# Altium PCB test.PcbDoc
Units mil, origin at the board's own origin, x right, y up, seen from the top; angles counter-clockwise.
Board outline 6250 x 4000 mil, 2 copper layers (Top Layer, Bottom Layer); 89 components, 84 nets, 511 pads, 0 vias.
Unrouted connection lines stored in the file: 226.
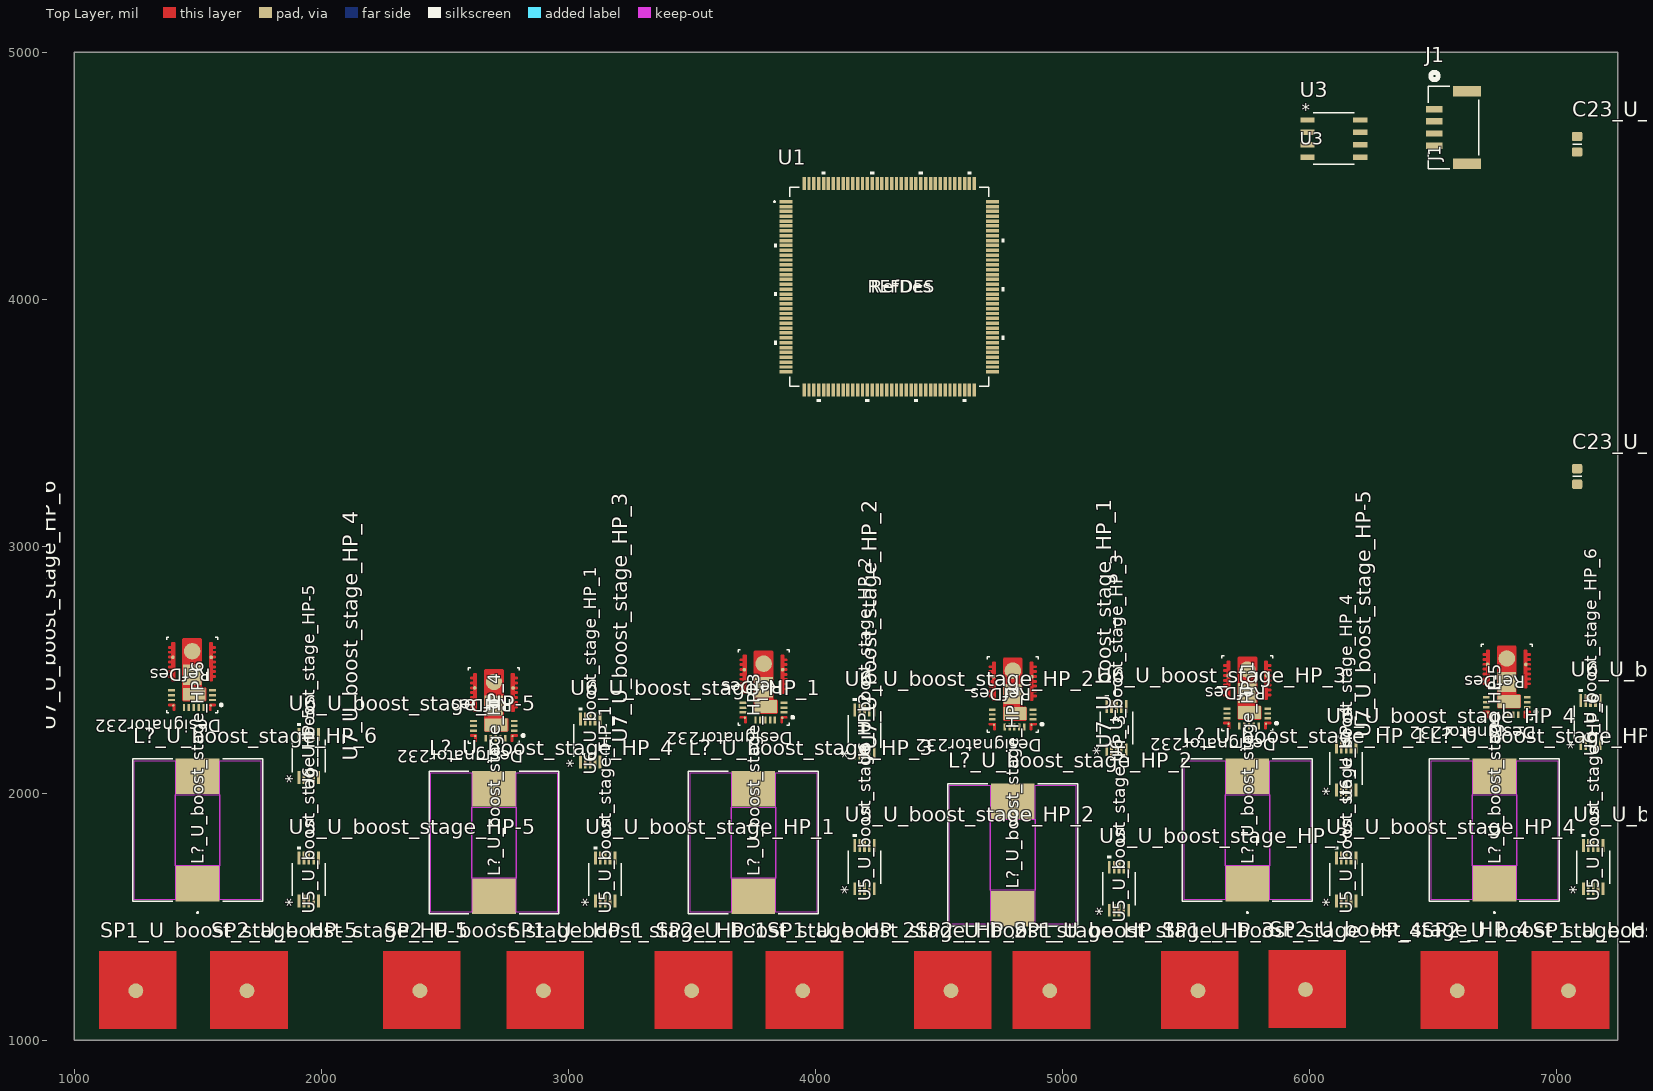
[diagram p0: Top Layer view]
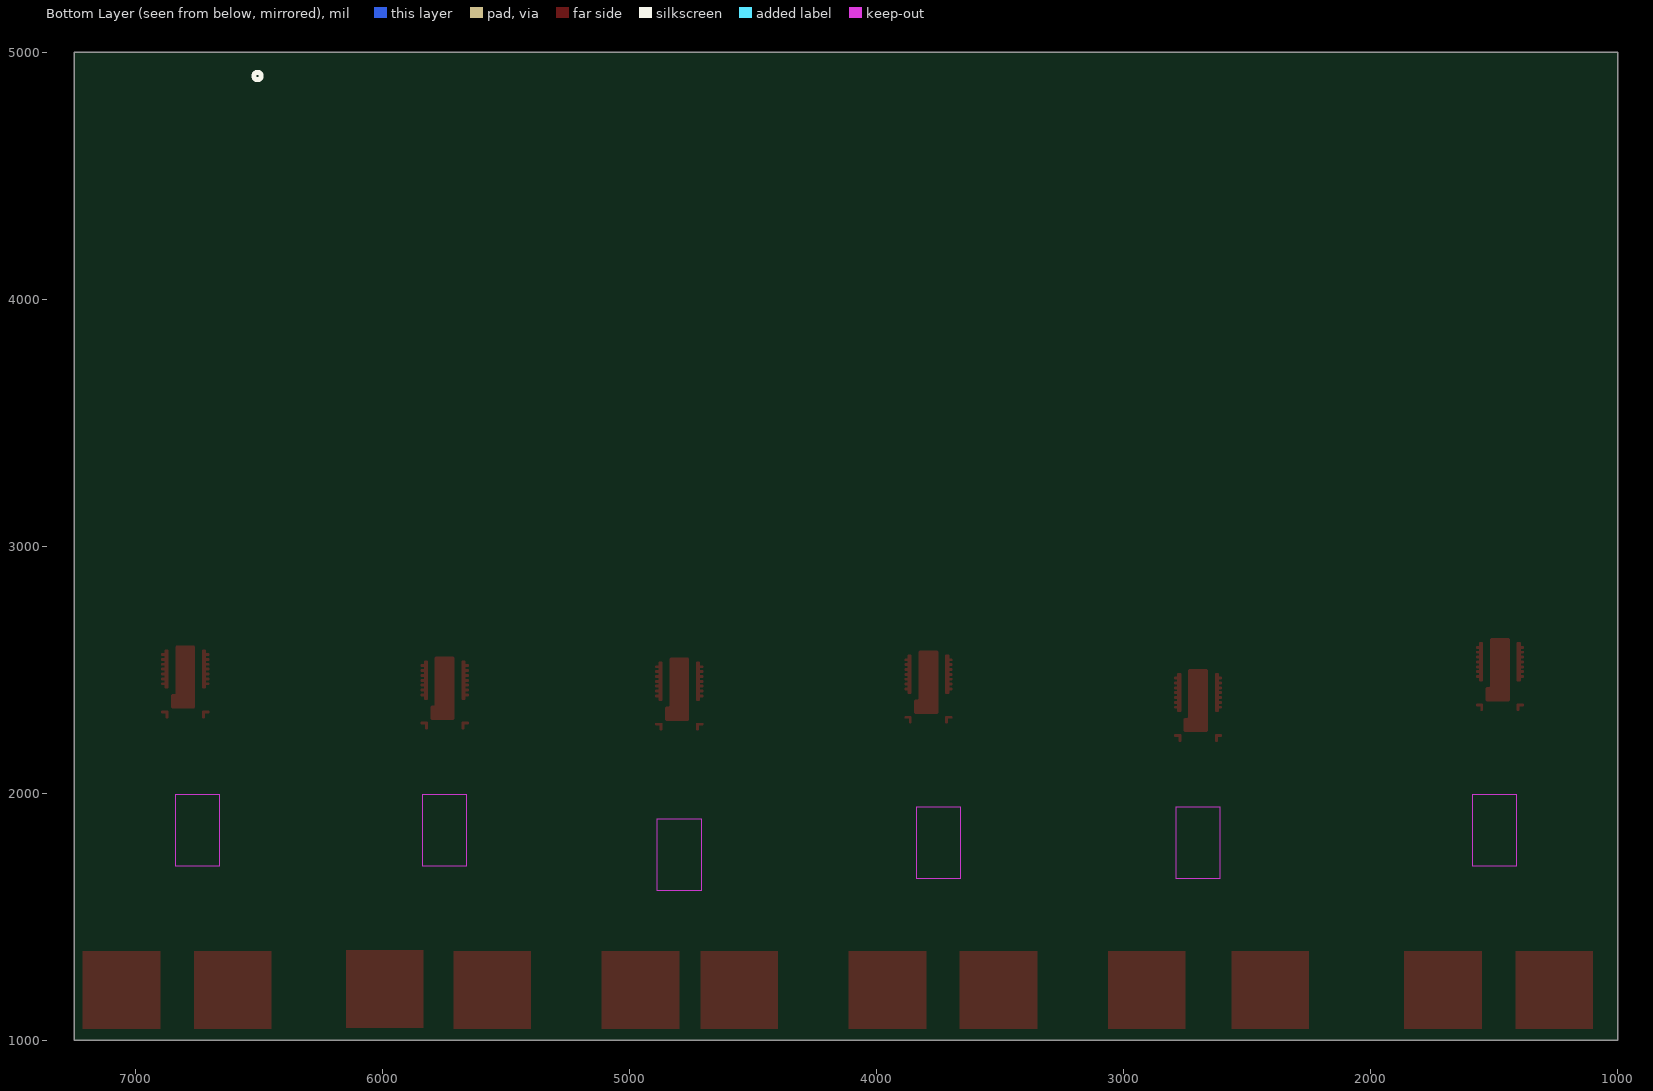
[diagram p1: Bottom Layer view, seen from below]

## Layer stack, top to bottom
Top Solder: solder mask 0.4, Solder Resist, Dk 3.5
Top Layer: signal copper 1.4
Dielectric 1: dielectric 12.6, FR-4, Dk 4.8
Bottom Layer: signal copper 1.4
Bottom Solder: solder mask 0.4, Solder Resist, Dk 3.5

## Board outline
1000,1000 7250,1000 7250,5000 1000,5000

## Design rules (kind name [scope] priority, off if disabled: settings)
Clearance [All] p1: gap=10 ignorepadtopadclearanceinfootprint=FALSE
DiffPairsRouting [All] p1: maxlimit=10 minlimit=10 mostfreqgap=10 toplayer_minwidth=15 toplayer_maxwidth=15 toplayer_prefwidth=15 bottomlayer_minwidth=15 bottomlayer_maxwidth=15 bottomlayer_prefwidth=15 maxuncoupledlength=500
PolygonConnect [All] p1: connectstyle=Relief reliefconductorwidth=10 reliefentries=4 polygonreliefangle="90 Angle" airgapwidth=10
RoutingVias [All] p1: holewidth=28 width=50 viastyle="Through Hole" minholewidth=28 minwidth=50 maxholewidth=28 maxwidth=50
SolderMaskExpansion [All] p1: expansion=4 istentingtop=FALSE
SupplyNets "Schematic Supply Nets_5" [InNet('CAN_5V')] p1: voltage=0.000
SupplyNets "Schematic Supply Nets_4" [InNet('3V3')] p2: voltage=0.000
SupplyNets "Schematic Supply Nets_3" [InNet('GND')] p3: voltage=0.000
SupplyNets "Schematic Supply Nets_2" [InNet('CAN_GND')] p4: voltage=0.000
SupplyNets "Schematic Supply Nets_1" [InNet('PGND')] p5: voltage=0.000
SupplyNets "Schematic Supply Nets" [InNet('VREF_P')] p6: voltage=0.000
Width [All] p1: maxlimit=10 minlimit=10 preferedwidth=10
29 further rules are at their usual default settings.

## Classes and differential pairs
channel class boost_stage_HP: U_boost_stage_HP-5 U_boost_stage_HP_1 U_boost_stage_HP_2 U_boost_stage_HP_3 U_boost_stage_HP_4 U_boost_stage_HP_6
component class U_microcontroller: C1 C2 C3 C4 C5 C6 C7 C8 C9 C10 C11 C12 C13 C14 C15 C16 C17 C18 C19 C20 C21 C22 J1 R1 R2 R3 U3 U4
component class U_boost_stage_HP_6: C23_U_boost_stage_HP_6 C24_U_boost_stage_HP_6 L?_U_boost_stage_HP_6 R4_U_boost_stage_HP_6 R5_U_boost_stage_HP_6 SP1_U_boost_stage_HP_6 SP2_U_boost_stage_HP_6 U5_U_boost_stage_HP_6 U6_U_boost_stage_HP_6 U7_U_boost_stage_HP_6
component class U_boost_stage_HP_4: C23_U_boost_stage_HP_4 C24_U_boost_stage_HP_4 L?_U_boost_stage_HP_4 R4_U_boost_stage_HP_4 R5_U_boost_stage_HP_4 SP1_U_boost_stage_HP_4 SP2_U_boost_stage_HP_4 U5_U_boost_stage_HP_4 U6_U_boost_stage_HP_4 U7_U_boost_stage_HP_4
component class U_boost_stage_HP_3: C23_U_boost_stage_HP_3 C24_U_boost_stage_HP_3 L?_U_boost_stage_HP_3 R4_U_boost_stage_HP_3 R5_U_boost_stage_HP_3 SP1_U_boost_stage_HP_3 SP2_U_boost_stage_HP_3 U5_U_boost_stage_HP_3 U6_U_boost_stage_HP_3 U7_U_boost_stage_HP_3
component class U_boost_stage_HP_2: C23_U_boost_stage_HP_2 C24_U_boost_stage_HP_2 L?_U_boost_stage_HP_2 R4_U_boost_stage_HP_2 R5_U_boost_stage_HP_2 SP1_U_boost_stage_HP_2 SP2_U_boost_stage_HP_2 U5_U_boost_stage_HP_2 U6_U_boost_stage_HP_2 U7_U_boost_stage_HP_2
component class U_boost_stage_HP_1: C23_U_boost_stage_HP_1 C24_U_boost_stage_HP_1 L?_U_boost_stage_HP_1 R4_U_boost_stage_HP_1 R5_U_boost_stage_HP_1 SP1_U_boost_stage_HP_1 SP2_U_boost_stage_HP_1 U5_U_boost_stage_HP_1 U6_U_boost_stage_HP_1 U7_U_boost_stage_HP_1
component class U_boost_stage_HP-5: C23_U_boost_stage_HP-5 C24_U_boost_stage_HP-5 L?_U_boost_stage_HP-5 R4_U_boost_stage_HP-5 R5_U_boost_stage_HP-5 SP1_U_boost_stage_HP-5 SP2_U_boost_stage_HP-5 U5_U_boost_stage_HP-5 U6_U_boost_stage_HP-5 U7_U_boost_stage_HP-5
differential pair CAN: +CAN_H -CAN_L

## Components (designator, comment, footprint, x,y, rotation, side; value= is the part's Value field where it differs from the comment)
C1 "CC0603KRX7R5BB225" C0603 9795,1965 r0 top value=2.2µF
C2 "CC0603KRX7R5BB225" C0603 9965,1965 r0 top value=2.2µF
C3 "CC0603MRX7R5BB475" C0603 7930,2415 r0 top value=4.7µF
C4 "CC0603KRX7R7BB105" C0603 8100,2415 r0 top value=1µF
C5 "CC0603KRX7R7BB105" C0603 8270,2415 r0 top value=1µF
C6 "CC0603KRX7R8BB104" C0603 8445,2415 r0 top value=100nF
C7 "CC0603KRX7R8BB104" C0603 8615,2415 r0 top value=100nF
C8 "CC0603KRX7R8BB104" C0603 7935,1965 r0 top value=100nF
C9 "CC0603KRX7R8BB104" C0603 8105,1965 r0 top value=100nF
C10 "CC0603KRX7R8BB104" C0603 8275,1905 r90 top value=100nF
C11 "CC0603KRX7R8BB104" C0603 8495,1965 r0 top value=100nF
C12 "CC0603KRX7R8BB104" C0603 8695,1905 r90 top value=100nF
C13 "CC0603KRX7R8BB104" C0603 8915,1905 r90 top value=100nF
C14 "CC0603KRX7R8BB104" C0603 9135,1905 r90 top value=100nF
C15 "CC0603KRX7R8BB104" C0603 9355,1905 r90 top value=100nF
C16 "CC0603KRX7R8BB104" C0603 9575,1905 r90 top value=100nF
C17 "CC0603KRX7R7BB105" C0603 11005,1905 r90 top value=1µF
C18 "CC0603KRX7R8BB104" C0603 11225,1905 r90 top value=100nF
C19 "CC0603KRX7R8BB104" C0603 11625,1905 r90 top value=100nF
C20 "CC0603KRX7R8BB104" C0603 10775,1905 r90 top value=100nF
C21 "CC0603KRX7R7BB105" C0603 10335,1965 r0 top value=1µF
C22 "CC0603KRX7R8BB104" C0603 10545,1905 r90 top value=100nF
C23_U_boost_stage_HP-5 "CC0603KRX7R8BB104" C0603 7085,3250 r90 top value=100nF (schematic designator C23)
C23_U_boost_stage_HP_1 "CC0603KRX7R8BB104" C0603 7085,4595 r90 top value=100nF (schematic designator C23)
C23_U_boost_stage_HP_2 "CC0603KRX7R8BB104" C0603 7085,5960 r90 top value=100nF (schematic designator C23)
C23_U_boost_stage_HP_3 "CC0603KRX7R8BB104" C0603 7085,7325 r90 top value=100nF (schematic designator C23)
C23_U_boost_stage_HP_4 "CC0603KRX7R8BB104" C0603 7085,8690 r90 top value=100nF (schematic designator C23)
C23_U_boost_stage_HP_6 "CC0603KRX7R8BB104" C0603 7085,10055 r90 top value=100nF (schematic designator C23)
C24_U_boost_stage_HP-5 "CC0603KRX7R8BB104" C0603 8435,3250 r90 top value=100nF (schematic designator C24)
C24_U_boost_stage_HP_1 "CC0603KRX7R8BB104" C0603 8415,4595 r90 top value=100nF (schematic designator C24)
C24_U_boost_stage_HP_2 "CC0603KRX7R8BB104" C0603 8435,5960 r90 top value=100nF (schematic designator C24)
C24_U_boost_stage_HP_3 "CC0603KRX7R8BB104" C0603 8435,7325 r90 top value=100nF (schematic designator C24)
C24_U_boost_stage_HP_4 "CC0603KRX7R8BB104" C0603 8435,8690 r90 top value=100nF (schematic designator C24)
C24_U_boost_stage_HP_6 "CC0603KRX7R8BB104" C0603 8435,10055 r90 top value=100nF (schematic designator C24)
J1 "BM04B-GHS-TBT" CONN_BM04B-GHS-TBT_JST 6585,4695 r90 top
L?_U_boost_stage_HP-5 "SLO1365H330MTT" IND_SLO1365H_SLT 6750,1850 r90 top (schematic designator L?)
L?_U_boost_stage_HP_1 "SLO1365H330MTT" IND_SLO1365H_SLT 5750,1850 r90 top (schematic designator L?)
L?_U_boost_stage_HP_2 "SLO1365H330MTT" IND_SLO1365H_SLT 4800,1750 r90 top (schematic designator L?)
L?_U_boost_stage_HP_3 "SLO1365H330MTT" IND_SLO1365H_SLT 3750,1800 r90 top (schematic designator L?)
L?_U_boost_stage_HP_4 "SLO1365H330MTT" IND_SLO1365H_SLT 2700,1800 r90 top (schematic designator L?)
L?_U_boost_stage_HP_6 "SLO1365H330MTT" IND_SLO1365H_SLT 1500,1850 r90 top (schematic designator L?)
R1 "RC0603JR-070RL" RESC1608X55X25ML10T15 13050,1955 r0 top value=0Ω
R2 "RC0603FR-0760R4L" RESC1608X55X25ML10T15 12870,1955 r0 top value=60.4Ω
R3 "RC0603FR-0760R4L" RESC1608X55X25ML10T15 11480,1955 r0 top value=60.4Ω
R4_U_boost_stage_HP-5 "PA2512FKE7T0R015E" FP-PA2512E-R007-0R10-MFG 15170,3065 r90 top value=15mΩ (schematic designator R4)
R4_U_boost_stage_HP_1 "PA2512FKE7T0R015E" FP-PA2512E-R007-0R10-MFG 15050,4410 r90 top value=15mΩ (schematic designator R4)
R4_U_boost_stage_HP_2 "PA2512FKE7T0R015E" FP-PA2512E-R007-0R10-MFG 15170,5770 r90 top value=15mΩ (schematic designator R4)
R4_U_boost_stage_HP_3 "PA2512FKE7T0R015E" FP-PA2512E-R007-0R10-MFG 15170,7135 r90 top value=15mΩ (schematic designator R4)
R4_U_boost_stage_HP_4 "PA2512FKE7T0R015E" FP-PA2512E-R007-0R10-MFG 15170,8500 r90 top value=15mΩ (schematic designator R4)
R4_U_boost_stage_HP_6 "PA2512FKE7T0R015E" FP-PA2512E-R007-0R10-MFG 15170,9865 r90 top value=15mΩ (schematic designator R4)
R5_U_boost_stage_HP-5 "PA2512FKF7W0R02E" FP-PA2512E-R007-0R10-MFG 16460,3065 r90 top value=20mΩ (schematic designator R5)
R5_U_boost_stage_HP_1 "PA2512FKF7W0R02E" FP-PA2512E-R007-0R10-MFG 16320,4410 r90 top value=20mΩ (schematic designator R5)
R5_U_boost_stage_HP_2 "PA2512FKF7W0R02E" FP-PA2512E-R007-0R10-MFG 16460,5770 r90 top value=20mΩ (schematic designator R5)
R5_U_boost_stage_HP_3 "PA2512FKF7W0R02E" FP-PA2512E-R007-0R10-MFG 16460,7135 r90 top value=20mΩ (schematic designator R5)
R5_U_boost_stage_HP_4 "PA2512FKF7W0R02E" FP-PA2512E-R007-0R10-MFG 16460,8500 r90 top value=20mΩ (schematic designator R5)
R5_U_boost_stage_HP_6 "PA2512FKF7W0R02E" FP-PA2512E-R007-0R10-MFG 16460,9865 r90 top value=20mΩ (schematic designator R5)
SP1_U_boost_stage_HP-5 "Solder Pad" "Solder Pad-Footprint-1" 1415,1045 r90 top (schematic designator SP1)
SP1_U_boost_stage_HP_1 "Solder Pad" "Solder Pad-Footprint-1" 3065,1045 r90 top (schematic designator SP1)
SP1_U_boost_stage_HP_2 "Solder Pad" "Solder Pad-Footprint-1" 4115,1045 r90 top (schematic designator SP1)
SP1_U_boost_stage_HP_3 "Solder Pad" "Solder Pad-Footprint-1" 5115,1045 r90 top (schematic designator SP1)
SP1_U_boost_stage_HP_4 "Solder Pad" "Solder Pad-Footprint-1" 5715,1045 r90 top (schematic designator SP1)
SP1_U_boost_stage_HP_6 "Solder Pad" "Solder Pad-Footprint-1" 7215,1045 r90 top (schematic designator SP1)
SP2_U_boost_stage_HP-5 "Solder Pad" "Solder Pad-Footprint-1" 1865,1045 r90 top (schematic designator SP2)
SP2_U_boost_stage_HP_1 "Solder Pad" "Solder Pad-Footprint-1" 2565,1045 r90 top (schematic designator SP2)
SP2_U_boost_stage_HP_2 "Solder Pad" "Solder Pad-Footprint-1" 3665,1045 r90 top (schematic designator SP2)
SP2_U_boost_stage_HP_3 "Solder Pad" "Solder Pad-Footprint-1" 4715,1045 r90 top (schematic designator SP2)
SP2_U_boost_stage_HP_4 "Solder Pad" "Solder Pad-Footprint-1" 6150,1050 r90 top (schematic designator SP2)
SP2_U_boost_stage_HP_6 "Solder Pad" "Solder Pad-Footprint-1" 6765,1045 r90 top (schematic designator SP2)
U1 "STM32H743ZIT6" LQFP144-20x20mm 4300,4050 r0 top
U3 "ISO1044BDR" SOIC_1044BDR_TEX 6100,4650 r0 top
U4 "ESDCAN05-2BWY" SOT323-3L_STM 10180,1755 r90 top
U5_U_boost_stage_HP-5 "INA238AIDGSR" VSSOP_8AIDGST_TEX 1950,1650 r90 top (schematic designator U5)
U5_U_boost_stage_HP_1 "INA238AIDGSR" VSSOP_8AIDGST_TEX 3150,1650 r90 top (schematic designator U5)
U5_U_boost_stage_HP_2 "INA238AIDGSR" VSSOP_8AIDGST_TEX 4200,1700 r90 top (schematic designator U5)
U5_U_boost_stage_HP_3 "INA238AIDGSR" VSSOP_8AIDGST_TEX 5230.31,1612.86 r90 top (schematic designator U5)
U5_U_boost_stage_HP_4 "INA238AIDGSR" VSSOP_8AIDGST_TEX 6150,1650 r90 top (schematic designator U5)
U5_U_boost_stage_HP_6 "INA238AIDGSR" VSSOP_8AIDGST_TEX 7150,1700 r90 top (schematic designator U5)
U6_U_boost_stage_HP-5 "INA238AIDGSR" VSSOP_8AIDGST_TEX 1950,2150 r90 top (schematic designator U6)
U6_U_boost_stage_HP_1 "INA238AIDGSR" VSSOP_8AIDGST_TEX 3089.38,2212.86 r90 top (schematic designator U6)
U6_U_boost_stage_HP_2 "INA238AIDGSR" VSSOP_8AIDGST_TEX 4200,2250 r90 top (schematic designator U6)
U6_U_boost_stage_HP_3 "INA238AIDGSR" VSSOP_8AIDGST_TEX 5219.69,2262.86 r90 top (schematic designator U6)
U6_U_boost_stage_HP_4 "INA238AIDGSR" VSSOP_8AIDGST_TEX 6150,2100 r90 top (schematic designator U6)
U6_U_boost_stage_HP_6 "INA238AIDGSR" VSSOP_8AIDGST_TEX 7139.38,2287.14 r90 top (schematic designator U6)
U7_U_boost_stage_HP-5 "LMG2100R026VBNR" VBN0018A-MFG 6800,2449.29 r180 top (schematic designator U7)
U7_U_boost_stage_HP_1 "LMG2100R026VBNR" VBN0018A-MFG 5749.59,2404.12 r180 top (schematic designator U7)
U7_U_boost_stage_HP_2 "LMG2100R026VBNR" VBN0018A-MFG 4800,2400 r180 top (schematic designator U7)
U7_U_boost_stage_HP_3 "LMG2100R026VBNR" VBN0018A-MFG 3791.14,2428.15 r180 top (schematic designator U7)
U7_U_boost_stage_HP_4 "LMG2100R026VBNR" VBN0018A-MFG 2699.59,2354.12 r180 top (schematic designator U7)
U7_U_boost_stage_HP_6 "LMG2100R026VBNR" VBN0018A-MFG 1477.51,2478.4 r180 top (schematic designator U7)

## Footprints (in the part's own frame and the unit in brackets; to place one, negate y for a bottom-side part, rotate by r counter-clockwise, add the part's x,y. Pads: shape width x height; smd on the part's side, far side on the other; paste and mask are expansions set on the pad)
C0603 [mm] "Capacitor 0603 Footprint"
  rrect30% 0.945x1.05 smd: 1(0.013,0) 2(1.613,0)
  silkscreen extent 0.81,-0.46 0.81,0.46, body extent -0.06,-0.48 1.69,0.48, height 0.95
CONN_BM04B-GHS-TBT_JST [mil]
  rect 26x67 smd paste+0 mask+0: 1(73.82,77.81) 2(24.61,77.81) 3(-24.61,77.81) 4(-73.82,77.81)
  rect 43x114 smd paste+0 mask+0: 5(-146.65,-54.07) 6(146.65,-54.07)
  silkscreen extent -168,-102 223,103, body extent -162,-100 162,95, height 165
FP-PA2512E-R007-0R10-MFG [mm]
  rect 1.65x3.68 smd paste+0 mask+0: 1(-2.855,0) 2(2.855,0)
  silkscreen extent -1.66,-1.72 1.66,1.72, body extent -3.78,-1.94 3.78,1.94, height 0.25
IND_SLO1365H_SLT [mil]
  rect 143.59x177 smd paste+0 mask+0: 1(-217.61,0) 2(217.61,0)
  Top Layer keep-out region: -281.5,-256 -281.5,-90.5 281.5,-90.5 281.5,-256
  Top Layer keep-out region: -281.5,90.5 -281.5,256 281.5,256 281.5,90.5
  Top Layer keep-out region: -143.82,-90.5 -143.82,90.5 143.82,90.5 143.82,-90.5
  Keep-Out Layer region: -143.82,-90.5 -143.82,90.5 143.82,90.5 143.82,-90.5
  silkscreen extent -336,-263 288,263, body extent -284,-258 284,258, height 258
LQFP144-20x20mm [mil]
  rect 53x14 smd paste+0 mask+0: 1(-418.31,344.49) 2(-418.31,324.8) 3(-418.31,305.12) 4(-418.31,285.43) 5(-418.31,265.75) 6(-418.31,246.06) 7(-418.31,226.38) 8(-418.31,206.69) 9(-418.31,187.01) 10(-418.31,167.32) 11(-418.31,147.64) 12(-418.31,127.95) 13(-418.31,108.27) 14(-418.31,88.58) 15(-418.31,68.9) 16(-418.31,49.21) 17(-418.31,29.53) 18(-418.31,9.84) 19(-418.31,-9.84) 20(-418.31,-29.53) 21(-418.31,-49.21) 22(-418.31,-68.9) 23(-418.31,-88.58) 24(-418.31,-108.27) 25(-418.31,-127.95) 26(-418.31,-147.64) 27(-418.31,-167.32) 28(-418.31,-187.01) 29(-418.31,-206.69) 30(-418.31,-226.38) 31(-418.31,-246.06) 32(-418.31,-265.75) 33(-418.31,-285.43) 34(-418.31,-305.12) 35(-418.31,-324.8) 36(-418.31,-344.49) 73(418.31,-344.49) 74(418.31,-324.8) 75(418.31,-305.12) 76(418.31,-285.43) 77(418.31,-265.75) 78(418.31,-246.06) 79(418.31,-226.38) 80(418.31,-206.69) 81(418.31,-187.01) 82(418.31,-167.32) 83(418.31,-147.64) 84(418.31,-127.95) 85(418.31,-108.27) 86(418.31,-88.58) 87(418.31,-68.9) 88(418.31,-49.21) 89(418.31,-29.53) 90(418.31,-9.84) 91(418.31,9.84) 92(418.31,29.53) 93(418.31,49.21) 94(418.31,68.9) 95(418.31,88.58) 96(418.31,108.27) 97(418.31,127.95) 98(418.31,147.64) 99(418.31,167.32) 100(418.31,187.01) 101(418.31,206.69) 102(418.31,226.38) 103(418.31,246.06) 104(418.31,265.75) 105(418.31,285.43) 106(418.31,305.12) 107(418.31,324.8) 108(418.31,344.49)
  rect 14x53 smd paste+0 mask+0: 37(-344.49,-418.31) 38(-324.8,-418.31) 39(-305.12,-418.31) 40(-285.43,-418.31) 41(-265.75,-418.31) 42(-246.06,-418.31) 43(-226.38,-418.31) 44(-206.69,-418.31) 45(-187.01,-418.31) 46(-167.32,-418.31) 47(-147.64,-418.31) 48(-127.95,-418.31) 49(-108.27,-418.31) 50(-88.58,-418.31) 51(-68.9,-418.31) 52(-49.21,-418.31) 53(-29.53,-418.31) 54(-9.84,-418.31) 55(9.84,-418.31) 56(29.53,-418.31) 57(49.21,-418.31) 58(68.9,-418.31) 59(88.58,-418.31) 60(108.27,-418.31) 61(127.95,-418.31) 62(147.64,-418.31) 63(167.32,-418.31) 64(187.01,-418.31) 65(206.69,-418.31) 66(226.38,-418.31) 67(246.06,-418.31) 68(265.75,-418.31) 69(285.43,-418.31) 70(305.12,-418.31) 71(324.8,-418.31) 72(344.49,-418.31) 109(344.49,418.31) 110(324.8,418.31) 111(305.12,418.31) 112(285.43,418.31) 113(265.75,418.31) 114(246.06,418.31) 115(226.38,418.31) 116(206.69,418.31) 117(187.01,418.31) 118(167.32,418.31) 119(147.64,418.31) 120(127.95,418.31) 121(108.27,418.31) 122(88.58,418.31) 123(68.9,418.31) 124(49.21,418.31) 125(29.53,418.31) 126(9.84,418.31) 127(-9.84,418.31) 128(-29.53,418.31) 129(-49.21,418.31) 130(-68.9,418.31) 131(-88.58,418.31) 132(-108.27,418.31) 133(-127.95,418.31) 134(-147.64,418.31) 135(-167.32,418.31) 136(-187.01,418.31) 137(-206.69,418.31) 138(-226.38,418.31) 139(-246.06,418.31) 140(-265.75,418.31) 141(-285.43,418.31) 142(-305.12,418.31) 143(-324.8,418.31) 144(-344.49,418.31)
  silkscreen extent -468,-465 465,465, body extent -431,-431 431,431, height 63
RESC1608X55X25ML10T15 [mm] "Chip Resistor, 2-Leads, Body 1.60x0.80mm, IPC Low Density"
  rect 0.8x1 smd: 1(-0.75,0) 2(0.75,0)
  body extent -0.85,-0.45 0.85,0.45, height 0.55
SOIC_1044BDR_TEX [mil]
  rect 57.28x21.97 smd paste+0 mask+0: 1(-107.14,75) 2(-107.14,25) 3(-107.14,-25) 4(-107.14,-75) 5(107.14,-75) 6(107.14,-25) 7(107.14,25) 8(107.14,75)
  silkscreen extent -84,-104 84,104, body extent -122,-99 122,99, height 69
"Solder Pad-Footprint-1" [mil]
  round 60 smd paste-99999 mask+4: SP(155,165)
  Top Layer region: 0,0 315,0 315,315 0,315
SOT323-3L_STM [mil]
  rect 18x40 smd paste+0 mask+0: 1(-25.59,-41) 2(25.59,-41) 3(0,41)
  silkscreen extent -98,-52 48,32, body extent -44,-47 44,47, height 43
VBN0018A-MFG [mm]
  round 0.228 smd paste+0 mask+0: 1(-1.925,3.125) 11(1.925,3.125)
  rect 0.7x0.25 smd paste+0 mask+0: 2(-2.1,2.575) 3(-2.1,2.075) 4(-2.1,1.575) 8(2.1,1.575) 9(2.1,2.075) 10(2.1,2.575)
  round 0.376 smd paste+0 mask+0: 5(-1.969,-1.819) 7(1.969,-1.819)
  round 1.691 smd paste-0.833 mask+0: 6(-0.01,-2.435)
  rect 0.25x0.7 smd paste+0 mask+0: 12(0.825,3.35) 13(0.325,3.35) 14(-0.175,3.35) 15(-0.675,3.35) 16(-1.175,3.35)
  rect 2.35x1.33 smd paste-1.162 mask+0: 17(-0.225,1.985)
  rect 1.9x2.076 smd paste-1.025 mask+0: 18(0,-0.018)
  Top Layer region: -1.45,1.37 -1.45,2.6 -1.35,2.7 0.9,2.7 1,2.6 1,-3.65 0.9,-3.75 -0.9,-3.75 -1,-3.65 -1,1.17 -1.1,1.27 -1.35,1.27
  Top Layer region: -1.8,2.95 -2.4,2.95 -2.45,3 -2.45,3.15 -2.4,3.2 -2.05,3.2 -2,3.25 -2,3.65 -1.95,3.7 -1.8,3.7 -1.75,3.65 -1.75,3
  Top Layer region: 1.8,2.95 2.4,2.95 2.45,3 2.45,3.15 2.4,3.2 2.05,3.2 2,3.25 2,3.65 1.95,3.7 1.8,3.7 1.75,3.65 1.75,3
  Top Layer region: -0.55,-3.425 -0.55,-3.65 -0.6,-3.7 -0.75,-3.7 -0.8,-3.65 -0.8,-3.425 -0.85,-3.375 -0.9,-3.375 -0.95,-3.325 -0.95,-1.406 -0.9,-1.356 0.9,-1.356 0.95,-1.406 0.95,-3.325 0.9,-3.375 0.5,-3.375 0.45,-3.425 0.45,-3.65 0.4,-3.7 0.25,-3.7 0.2,-3.65 0.2,-3.425 0.15,-3.375 0,-3.375 -0.05,-3.425 -0.05,-3.65 -0.1,-3.7 -0.25,-3.7 -0.3,-3.65 -0.3,-3.425 -0.35,-3.375 -0.5,-3.375
  Top Layer region: -1.8,0.65 -2.075,0.65 -2.125,0.6 -2.125,0.338 -2.175,0.288 -2.4,0.288 -2.45,0.238 -2.45,0.088 -2.4,0.038 -2.175,0.038 -2.125,-0.012 -2.125,-0.162 -2.175,-0.212 -2.4,-0.212 -2.45,-0.262 -2.45,-0.412 -2.4,-0.462 -2.175,-0.462 -2.125,-0.512 -2.125,-0.662 -2.175,-0.712 -2.4,-0.712 -2.45,-0.762 -2.45,-0.912 -2.4,-0.962 -2.175,-0.962 -2.125,-1.012 -2.125,-1.162 -2.175,-1.212 -2.4,-1.212 -2.45,-1.262 -2.45,-1.412 -2.4,-1.462 -2.175,-1.462 -2.125,-1.512 -2.125,-1.662 -2.175,-1.712 -2.4,-1.712 -2.45,-1.762 -2.45,-1.912 -2.4,-1.962 -2.175,-1.962 -2.125,-2.012 -2.125,-2.162 -2.175,-2.212 -2.4,-2.212 -2.45,-2.262 -2.45,-2.412 -2.4,-2.462 -2.175,-2.462 -2.125,-2.512 -2.125,-2.662 -2.175,-2.712 -2.4,-2.712 -2.45,-2.762 -2.45,-2.912 -2.4,-2.962 -2.175,-2.962 -2.125,-3.012 -2.125,-3.3 -2.075,-3.35 -1.8,-3.35 -1.75,-3.3 -1.75,0.6
  Top Layer region: 1.8,0.65 2.075,0.65 2.125,0.6 2.125,0.338 2.175,0.288 2.4,0.288 2.45,0.238 2.45,0.088 2.4,0.038 2.175,0.038 2.125,-0.012 2.125,-0.162 2.175,-0.212 2.4,-0.212 2.45,-0.262 2.45,-0.412 2.4,-0.462 2.175,-0.462 2.125,-0.512 2.125,-0.662 2.175,-0.712 2.4,-0.712 2.45,-0.762 2.45,-0.912 2.4,-0.962 2.175,-0.962 2.125,-1.012 2.125,-1.162 2.175,-1.212 2.4,-1.212 2.45,-1.262 2.45,-1.412 2.4,-1.462 2.175,-1.462 2.125,-1.512 2.125,-1.662 2.175,-1.712 2.4,-1.712 2.45,-1.762 2.45,-1.912 2.4,-1.962 2.175,-1.962 2.125,-2.012 2.125,-2.162 2.175,-2.212 2.4,-2.212 2.45,-2.262 2.45,-2.412 2.4,-2.462 2.175,-2.462 2.125,-2.512 2.125,-2.662 2.175,-2.712 2.4,-2.712 2.45,-2.762 2.45,-2.912 2.4,-2.962 2.175,-2.962 2.125,-3.012 2.125,-3.3 2.075,-3.35 1.8,-3.35 1.75,-3.3 1.75,0.6
  silkscreen extent -3.13,-3.88 2.63,3.88
VSSOP_8AIDGST_TEX [mil]
  rect 52.28x11 smd paste+0 mask+0: 1(-87.14,39.38) 2(-87.14,19.69) 3(-87.14,0) 4(-87.14,-19.69) 5(-87.14,-39.38) 6(87.14,-39.38) 7(87.14,-19.69) 8(87.14,0) 9(87.14,19.69) 10(87.14,39.38)
  silkscreen extent -66,-66 133,66, body extent -99,-61 99,61, height 43

## Part data
C1 C2: library part CMP-00207-1, "6.3V 2.2uF X7R ±10% 0603 Multilayer Ceramic Capacitors MLCC - SMD/SMT ROHS", Case Code (Imperial)=0603, Case Code (Metric)=1608, Dielectric=X7R, Dielectric Material=Ceramic, Max Operating Temperature=125°C, Min Operating Temperature=-55°C, Tolerance=10%, Voltage Rating=6.3V, Case/Package=0603, China RoHS=Compliant, Composition=Ceramic, Country of Origin="Mainland China, Taiwan", Depth=800µm, Export Control Classification Number (ECCN) Code=EAR99, Halogen Free="Halogen Free", Harmonized Tariff Schedule (HTS) Code=8532.24.00.20, Height=800µm, Introduction Date=2009-04-17, Lead Free="Lead Free", Length=1.6mm, Lifecycle Status=Production, Material=Ceramic, Mounting Technology="Surface Mount", Number of Terminals=2, Packaging="Tape and Reel", Radiation Hardening=No, REACH SVHC=Yes, RoHS=Compliant, Schedule B="8532240020, 8532240020", Termination=SMD/SMT, Thickness=889µm, Voltage Rating (DC)=6.3V, Weight=2.012816mg, Width=800µm
C3: library part CMP-00209-1, "Multilayer Ceramic Capacitors MLCC - SMD/SMT 6.3V 4.7uF X7R 0603 20%", Case/Package=0603, Dielectric=X7R, Dielectric Material=Ceramic, Max Operating Temperature=125°C, Min Operating Temperature=-55°C, Tolerance=20%, Voltage Rating=6.3V, China RoHS=Compliant, Country of Origin="Mainland China, Taiwan", Export Control Classification Number (ECCN) Code=EAR99, Halogen Free="Halogen Free", Harmonized Tariff Schedule (HTS) Code=8532.24.00.20, Height=800µm, Introduction Date=2012-07-17, Lead Free="Lead Free", Length=1.6mm, Lifecycle Status=Production, Material=Ceramic, Mounting Technology="Surface Mount", Number of Terminals=2, REACH SVHC=Yes, RoHS=Compliant, Schedule B=8532240020, Voltage Rating (DC)=6.3V, Width=800µm
C4 C5 C17 C21: library part CMP-00211-1, "16V 1uF X7R ±10% 0603 Multilayer Ceramic Capacitors MLCC - SMD/SMT ROHS", Case Code (Imperial)=0603, Case Code (Metric)=1608, Dielectric=X7R, Dielectric Material=Ceramic, Max Operating Temperature=125°C, Min Operating Temperature=-55°C, Tolerance=10%, Voltage=16V, Case/Package=0603, China RoHS=Compliant, Composition=Ceramic, Country of Origin="Mainland China, Taiwan", Depth=800µm, Dissipation Factor=5%, Export Control Classification Number (ECCN) Code=EAR99, Halogen Free="Halogen Free", Harmonized Tariff Schedule (HTS) Code=8532.24.00.20, Height=800µm, Introduction Date=2009-04-17, Lead Free="Lead Free", Length=1.6mm, Lifecycle Status=Production, Material=Ceramic, Mounting Technology="Surface Mount", Number of Terminals=2, Pins=2, Radiation Hardening=No, REACH SVHC=Yes, RoHS=Compliant, Schedule B="8532240020, 8532240020", Termination=SMD/SMT, Thickness=889µm, Voltage Rating=16V, Voltage Rating (DC)=16V, Width=800µm
C6 C7 C8 C9 C10 C11 C12 C13 C14 C15 C16 C18 C19 C20 C22 C23_U_boost_stage_HP-5 C23_U_boost_stage_HP_1 C23_U_boost_stage_HP_2 C23_U_boost_stage_HP_3 C23_U_boost_stage_HP_4 C23_U_boost_stage_HP_6 C24_U_boost_stage_HP-5 C24_U_boost_stage_HP_1 C24_U_boost_stage_HP_2 C24_U_boost_stage_HP_3 C24_U_boost_stage_HP_4 C24_U_boost_stage_HP_6: library part CMP-00179-1, "25V 100nF X7R ±10% 0603 Multilayer Ceramic Capacitors MLCC - SMD/SMT ROHS", Case Code (Imperial)=0603, Case Code (Metric)=1608, Dielectric=X7R, Dielectric Material=Ceramic, Max Operating Temperature=125°C, Min Operating Temperature=-55°C, Tolerance=10%, Voltage=25V, Case/Package=0603, China RoHS=Compliant, Composition=Ceramic, Depth=800µm, Halogen Free="Halogen Free", Height=800µm, Lead Free="Lead Free", Length=1.6mm, Lifecycle Status=Production, Material=Ceramic, Mounting Technology="Surface Mount", Number of Terminals=2, Pins=2, Radiation Hardening=No, REACH SVHC=Yes, RoHS=Compliant, Schedule B="8532240020, 8532240020", Termination=SMD/SMT, Thickness=889µm, Voltage Rating=25V, Voltage Rating (DC)=25V, Width=800µm
J1: library part CMP-189-000000-2, "Description", Manufacturer_Name=JST, Copyright="Copyright (C) 2026 Ultra Librarian. All rights reserved.", Design Item ID=BM04B-GHS-TBT, Manufacturer_Part_Number=BM04B-GHS-TBT, RefDes=RefDes, Source=BM04B-GHS-TBT.SchLib, Type=Type
L?_U_boost_stage_HP-5 L?_U_boost_stage_HP_1 L?_U_boost_stage_HP_2 L?_U_boost_stage_HP_3 L?_U_boost_stage_HP_4 L?_U_boost_stage_HP_6: library part CMP-050-000018-1, "Description", Manufacturer_Name=Sunltech, Copyright="Copyright (C) 2026 Ultra Librarian. All rights reserved.", Design Item ID=SLO1365H330MTT, Manufacturer_Part_Number=SLO1365H330MTT, Source=SLO1365H330MTT.SchLib
R1: library part CMP-RES-00050-1, "GENERAL PURPOSE CHIP RESISTOR Metal Glaze/thick Film, 0.1W, 0ohm, Surface Mount, 0603", Case Code (Imperial)=0603, Max Operating Temperature=155°C, Min Operating Temperature=-55°C, Power Dissipation=100mW, Temperature Coefficient=200ppm/°C, Tolerance=1%, Voltage Rating=50V, Case/Package=0603, China RoHS=Non-Compliant, Composition="Thick Film", Contact Plating=Tin, Country of Origin="Mainland China, Taiwan", Depth=800µm, Export Control Classification Number (ECCN) Code=EAR99, Harmonized Tariff Schedule (HTS) Code=8533.21.00.30, Height=450µm, Introduction Date=2001-06-08, Lead Free="Lead Free", Length=1.6mm, Lifecycle Status=Production, Military Standard=Not, Mounting Technology="Surface Mount", Number of Terminals=2, Packaging="Cut Tape", Pins=2, Power Rating=100mW, Radiation Hardening=No, REACH SVHC=Yes, RoHS=Compliant, Termination=SMD/SMT, Voltage Rating (DC)=50V, Width=800µm
R2 R3: library part CMP-RES-00051-1, "Res Thick Film 0603 60.4 Ohm 1% 0.1W(1/10W) ±100ppm/C Pad SMD T/R", Case Code (Imperial)=0603, Max Operating Temperature=155°C, Min Operating Temperature=-55°C, Power Dissipation=100mW, Temperature Coefficient=100ppm/°C, Tolerance=1%, Voltage Rating=75V, Voltage Rating (DC)=50V, Case/Package=0603, China RoHS=Non-Compliant, Composition="Thick Film", Country of Origin="Mainland China, Taiwan", Depth=800µm, Export Control Classification Number (ECCN) Code=EAR99, Harmonized Tariff Schedule (HTS) Code=8533.21.00.30, Height=450µm, Introduction Date=2004-09-22, Lead Free="Lead Free", Length=1.6mm, Lifecycle Status=Production, Military Standard=Not, Mounting Technology="Surface Mount", Number of Terminals=2, Packaging="Tape & Reel", Power Rating=100mW, REACH SVHC=Yes, RoHS=Compliant, Schedule B="8533210045, 8533210045", Termination=SMD/SMT, Width=800µm, Working Voltage=75V
R4_U_boost_stage_HP-5 R4_U_boost_stage_HP_1 R4_U_boost_stage_HP_2 R4_U_boost_stage_HP_3 R4_U_boost_stage_HP_4 R4_U_boost_stage_HP_6: library part CMP-00212-2, "Fixed Resistor, 3W, 0.015ohm, 0.2121V, 1% +/-Tol, 50ppm/Cel, Surface Mount, 2512", Case/Package=2512, Manufacturer Package Identifier=PA2512E-R007-0R10, Max Operating Temperature=170°C, Min Operating Temperature=-55°C, Power Dissipation=3W, Temperature Coefficient=50ppm/°C, Tolerance=1%, Working Voltage=212.1mV, China RoHS=Compliant, Composition="Metal Element", Country of Origin="Mainland China, Taiwan", Export Control Classification Number (ECCN) Code=EAR99, Harmonized Tariff Schedule (HTS) Code=8533.21.00.30, Height=630µm, Introduction Date=2016-04-07, Lifecycle Status=Production, Mounting Technology="Surface Mount", Number of Terminals=2, Power Rating=3W, REACH SVHC=Yes, RoHS=Compliant, Width=3.18mm
R5_U_boost_stage_HP-5 R5_U_boost_stage_HP_1 R5_U_boost_stage_HP_2 R5_U_boost_stage_HP_3 R5_U_boost_stage_HP_4 R5_U_boost_stage_HP_6: library part CMP-RES-00052-1, "Current Sensor-Low TCR Chip Resistor Automotive Grade Metal Film 2512 20mOhm 1% Emboss T/R", Case/Package=2512, Manufacturer Package Identifier=PA2512E-R007-0R10, Max Operating Temperature=170°C, Min Operating Temperature=-55°C, Power Dissipation=2W, Power Rating=3W, Temperature Coefficient=100ppm/°C, Tolerance=1%, Working Voltage=200mV, China RoHS=Compliant, Composition="Metal Element", Country of Origin="Mainland China, Taiwan", Export Control Classification Number (ECCN) Code=EAR99, Harmonized Tariff Schedule (HTS) Code=8533.21.00.30, Height=630µm, Introduction Date=2016-04-07, Lifecycle Status=Production, Mounting Technology="Surface Mount", Number of Terminals=2, REACH SVHC=Yes, RoHS=Compliant, Width=3.18mm
SP1_U_boost_stage_HP-5 SP1_U_boost_stage_HP_1 SP1_U_boost_stage_HP_2 SP1_U_boost_stage_HP_3 SP1_U_boost_stage_HP_4 SP1_U_boost_stage_HP_6 SP2_U_boost_stage_HP-5 SP2_U_boost_stage_HP_1 SP2_U_boost_stage_HP_2 SP2_U_boost_stage_HP_3 SP2_U_boost_stage_HP_4 SP2_U_boost_stage_HP_6: library part CMP-014-000043-2, "64mm^2 solder pad for wire to board connections,"
U1: library part CMP-015-000045-1, "High-performance and DSP with DP-FPU, Arm Cortex-M7 MCU with 2MBytes of Flash memory, 1MB RAM, 480 MHz CPU, Art Accelerator, L1 cache, external memory interface, large set of peripherals", Manufacturer_Name=STMicroelectronics, Copyright="Copyright (C) 2025 Ultra Librarian. All rights reserved.", Design Item ID=STM32H743ZIT6, Manufacturer_Part_Number=STM32H743ZIT6, RefDes=RefDes, Source=STM32H743ZIT6.SchLib, Type=Type
U3: library part CMP-183-000000-1, "Isolated CAN FD transceiver in small package 8-SOIC -40 to 125", Manufacturer_Name="Texas Instruments", Copyright="Copyright (C) 2025 Ultra Librarian. All rights reserved.", Design Item ID=ISO1044BDR, Manufacturer_Part_Number=ISO1044BDR, RefDes=RefDes, Source=ISO1044BDR.SchLib, Type=Type
U4: library part CMP-002-000046-1, "Automotive dual-line TVS in SOT323-3L for CAN bus (24 V system)", Manufacturer_Name=STMicroelectronics, Copyright="Copyright (C) 2025 Ultra Librarian. All rights reserved.", Design Item ID=ESDCAN05-2BWY, Manufacturer_Part_Number=ESDCAN05-2BWY, RefDes=RefDes, Source=ESDCAN05-2BWY.SchLib, Type=Type
U5_U_boost_stage_HP-5 U5_U_boost_stage_HP_1 U5_U_boost_stage_HP_2 U5_U_boost_stage_HP_3 U5_U_boost_stage_HP_4 U5_U_boost_stage_HP_6 U6_U_boost_stage_HP-5 U6_U_boost_stage_HP_1 U6_U_boost_stage_HP_2 U6_U_boost_stage_HP_3 U6_U_boost_stage_HP_4 U6_U_boost_stage_HP_6: library part CMP-192-000000-1, "85-V, 16-bit, high-precision I2C output current/voltage/power monitor with alert 10-VSSOP -40 to 125", Manufacturer_Name="Texas Instruments", Copyright="Copyright (C) 2026 Ultra Librarian. All rights reserved.", Design Item ID=INA238AIDGSR, Manufacturer_Part_Number=INA238AIDGSR, RefDes=RefDes, Source=INA238AIDGSR.SchLib, Type=Type
U7_U_boost_stage_HP-5 U7_U_boost_stage_HP_1 U7_U_boost_stage_HP_2 U7_U_boost_stage_HP_3 U7_U_boost_stage_HP_4 U7_U_boost_stage_HP_6: library part CMP-240-000000-1, "100V 2.6mâ„", Manufacturer_Name="Texas Instruments", Copyright="Copyright (C) 2025 Ultra Librarian. All rights reserved.", Design Item ID=LMG2100R026VBNR, Manufacturer_Part_Number=LMG2100R026VBNR, RefDes=RefDes, Source=LMG2100R026VBNR.SchLib, Type=TYPE

## Nets (pads, with @x,y where several pads share a name; then routed paths per layer and width w, separated by ;. In a path a pad name is that pad's centre, name@x,y a point inside that pad or via, vN(x,y) a via of type N, cw(c..) or ccw(c..) an arc to the next point about the centre after c; other vN are vias at no path point)
3V3: C3.2 C4.2 C5.2 C6.2 C7.2 C8.2 C9.2 C10.2 C11.2 C12.2 C13.2 C14.2 C15.2 C16.2 C20.2 C23_U_boost_stage_HP-5.2 C23_U_boost_stage_HP_1.2 C23_U_boost_stage_HP_2.2 C23_U_boost_stage_HP_3.2 C23_U_boost_stage_HP_4.2 C23_U_boost_stage_HP_6.2 C24_U_boost_stage_HP-5.2 C24_U_boost_stage_HP_1.2 C24_U_boost_stage_HP_2.2 C24_U_boost_stage_HP_3.2 C24_U_boost_stage_HP_4.2 C24_U_boost_stage_HP_6.2 R1.1 U1.6 U1.17 U1.30 U1.33 U1.39 U1.52 U1.62 U1.72 U1.84 U1.95 U1.108 U1.121 U1.131 U1.144 U3.1 U5_U_boost_stage_HP-5.6 U5_U_boost_stage_HP_1.6 U5_U_boost_stage_HP_2.6 U5_U_boost_stage_HP_3.6 U5_U_boost_stage_HP_4.6 U5_U_boost_stage_HP_6.6 U6_U_boost_stage_HP-5.6 U6_U_boost_stage_HP_1.6 U6_U_boost_stage_HP_2.6 U6_U_boost_stage_HP_3.6 U6_U_boost_stage_HP_4.6 U6_U_boost_stage_HP_6.6
A0_1_U_boost_stage_HP-5: U5_U_boost_stage_HP-5.2
A0_1_U_boost_stage_HP_1: U5_U_boost_stage_HP_1.2
A0_1_U_boost_stage_HP_2: U5_U_boost_stage_HP_2.2
A0_1_U_boost_stage_HP_3: U5_U_boost_stage_HP_3.2
A0_1_U_boost_stage_HP_4: U5_U_boost_stage_HP_4.2
A0_1_U_boost_stage_HP_6: U5_U_boost_stage_HP_6.2
A0_2_U_boost_stage_HP-5: U6_U_boost_stage_HP-5.2
A0_2_U_boost_stage_HP_1: U6_U_boost_stage_HP_1.2
A0_2_U_boost_stage_HP_2: U6_U_boost_stage_HP_2.2
A0_2_U_boost_stage_HP_3: U6_U_boost_stage_HP_3.2
A0_2_U_boost_stage_HP_4: U6_U_boost_stage_HP_4.2
A0_2_U_boost_stage_HP_6: U6_U_boost_stage_HP_6.2
A1_1_U_boost_stage_HP-5: U5_U_boost_stage_HP-5.1
A1_1_U_boost_stage_HP_1: U5_U_boost_stage_HP_1.1
A1_1_U_boost_stage_HP_2: U5_U_boost_stage_HP_2.1
A1_1_U_boost_stage_HP_3: U5_U_boost_stage_HP_3.1
A1_1_U_boost_stage_HP_4: U5_U_boost_stage_HP_4.1
A1_1_U_boost_stage_HP_6: U5_U_boost_stage_HP_6.1
A1_2_U_boost_stage_HP-5: U6_U_boost_stage_HP-5.1
A1_2_U_boost_stage_HP_1: U6_U_boost_stage_HP_1.1
A1_2_U_boost_stage_HP_2: U6_U_boost_stage_HP_2.1
A1_2_U_boost_stage_HP_3: U6_U_boost_stage_HP_3.1
A1_2_U_boost_stage_HP_4: U6_U_boost_stage_HP_4.1
A1_2_U_boost_stage_HP_6: U6_U_boost_stage_HP_6.1
ALERT_U_boost_stage_HP-5: U5_U_boost_stage_HP-5.3 U6_U_boost_stage_HP-5.3
ALERT_U_boost_stage_HP_1: U5_U_boost_stage_HP_1.3 U6_U_boost_stage_HP_1.3
ALERT_U_boost_stage_HP_2: U5_U_boost_stage_HP_2.3 U6_U_boost_stage_HP_2.3
ALERT_U_boost_stage_HP_3: U5_U_boost_stage_HP_3.3 U6_U_boost_stage_HP_3.3
ALERT_U_boost_stage_HP_4: U5_U_boost_stage_HP_4.3 U6_U_boost_stage_HP_4.3
ALERT_U_boost_stage_HP_6: U5_U_boost_stage_HP_6.3 U6_U_boost_stage_HP_6.3
CAN_5V: C21.2 C22.2 J1.1 U3.8
CAN_GND: C19.1 C21.1 C22.1 J1.4 U3.7 U4.3
CAN_H: J1.2 R2.2 U3.6 U4.1
CAN_L: J1.3 R3.1 U3.5 U4.2
FDCAN1_RX: U1.103 U3.3
FDCAN1_TX: U1.104 U3.2
GND: C1.2 C2.2 C3.1 C4.1 C5.1 C6.1 C7.1 C8.1 C9.1 C10.1 C11.1 C12.1 C13.1 C14.1 C15.1 C16.1 C17.1 C18.1 C20.1 C23_U_boost_stage_HP-5.1 C23_U_boost_stage_HP_1.1 C23_U_boost_stage_HP_2.1 C23_U_boost_stage_HP_3.1 C23_U_boost_stage_HP_4.1 C23_U_boost_stage_HP_6.1 C24_U_boost_stage_HP-5.1 C24_U_boost_stage_HP_1.1 C24_U_boost_stage_HP_2.1 C24_U_boost_stage_HP_3.1 C24_U_boost_stage_HP_4.1 C24_U_boost_stage_HP_6.1 SP2_U_boost_stage_HP-5.SP SP2_U_boost_stage_HP_1.SP SP2_U_boost_stage_HP_2.SP SP2_U_boost_stage_HP_3.SP SP2_U_boost_stage_HP_4.SP SP2_U_boost_stage_HP_6.SP U1.16 U1.31 U1.38 U1.51 U1.61 U1.83 U1.94 U1.107 U1.120 U1.130 U3.4 U5_U_boost_stage_HP-5.7 U5_U_boost_stage_HP_1.7 U5_U_boost_stage_HP_2.7 U5_U_boost_stage_HP_3.7 U5_U_boost_stage_HP_4.7 U5_U_boost_stage_HP_6.7 U6_U_boost_stage_HP-5.7 U6_U_boost_stage_HP_1.7 U6_U_boost_stage_HP_2.7 U6_U_boost_stage_HP_3.7 U6_U_boost_stage_HP_4.7 U6_U_boost_stage_HP_6.7 U7_U_boost_stage_HP-5.15 U7_U_boost_stage_HP_1.15 U7_U_boost_stage_HP_2.15 U7_U_boost_stage_HP_3.15 U7_U_boost_stage_HP_4.15 U7_U_boost_stage_HP_6.15
NetC1_1: C1.1 C2.1 U1.71 U1.106
NetC19_2: C19.2 R2.1 R3.2
NetL?_U_boost_stage_HP-5_1: L?_U_boost_stage_HP-5.1 U7_U_boost_stage_HP-5.5
NetL?_U_boost_stage_HP-5_2: L?_U_boost_stage_HP-5.2 R4_U_boost_stage_HP-5.2 U5_U_boost_stage_HP-5.9
NetL?_U_boost_stage_HP_1_1: L?_U_boost_stage_HP_1.1 U7_U_boost_stage_HP_1.5
NetL?_U_boost_stage_HP_1_2: L?_U_boost_stage_HP_1.2 R4_U_boost_stage_HP_1.2 U5_U_boost_stage_HP_1.9
NetL?_U_boost_stage_HP_2_1: L?_U_boost_stage_HP_2.1 U7_U_boost_stage_HP_2.5
NetL?_U_boost_stage_HP_2_2: L?_U_boost_stage_HP_2.2 R4_U_boost_stage_HP_2.2 U5_U_boost_stage_HP_2.9
NetL?_U_boost_stage_HP_3_1: L?_U_boost_stage_HP_3.1 U7_U_boost_stage_HP_3.5
NetL?_U_boost_stage_HP_3_2: L?_U_boost_stage_HP_3.2 R4_U_boost_stage_HP_3.2 U5_U_boost_stage_HP_3.9
NetL?_U_boost_stage_HP_4_1: L?_U_boost_stage_HP_4.1 U7_U_boost_stage_HP_4.5
NetL?_U_boost_stage_HP_4_2: L?_U_boost_stage_HP_4.2 R4_U_boost_stage_HP_4.2 U5_U_boost_stage_HP_4.9
NetL?_U_boost_stage_HP_6_1: L?_U_boost_stage_HP_6.1 U7_U_boost_stage_HP_6.5
NetL?_U_boost_stage_HP_6_2: L?_U_boost_stage_HP_6.2 R4_U_boost_stage_HP_6.2 U5_U_boost_stage_HP_6.9
NetR4_U_boost_stage_HP-5_1: R4_U_boost_stage_HP-5.1 SP1_U_boost_stage_HP-5.SP U5_U_boost_stage_HP-5.8 U5_U_boost_stage_HP-5.10
NetR4_U_boost_stage_HP_1_1: R4_U_boost_stage_HP_1.1 SP1_U_boost_stage_HP_1.SP U5_U_boost_stage_HP_1.8 U5_U_boost_stage_HP_1.10
NetR4_U_boost_stage_HP_2_1: R4_U_boost_stage_HP_2.1 SP1_U_boost_stage_HP_2.SP U5_U_boost_stage_HP_2.8 U5_U_boost_stage_HP_2.10
NetR4_U_boost_stage_HP_3_1: R4_U_boost_stage_HP_3.1 SP1_U_boost_stage_HP_3.SP U5_U_boost_stage_HP_3.8 U5_U_boost_stage_HP_3.10
NetR4_U_boost_stage_HP_4_1: R4_U_boost_stage_HP_4.1 SP1_U_boost_stage_HP_4.SP U5_U_boost_stage_HP_4.8 U5_U_boost_stage_HP_4.10
NetR4_U_boost_stage_HP_6_1: R4_U_boost_stage_HP_6.1 SP1_U_boost_stage_HP_6.SP U5_U_boost_stage_HP_6.8 U5_U_boost_stage_HP_6.10
NetR5_U_boost_stage_HP-5_1: R5_U_boost_stage_HP-5.1 U6_U_boost_stage_HP-5.8 U6_U_boost_stage_HP-5.10 U7_U_boost_stage_HP-5.7
NetR5_U_boost_stage_HP-5_2: R5_U_boost_stage_HP-5.2 U6_U_boost_stage_HP-5.9
NetR5_U_boost_stage_HP_1_1: R5_U_boost_stage_HP_1.1 U6_U_boost_stage_HP_1.8 U6_U_boost_stage_HP_1.10 U7_U_boost_stage_HP_1.7
NetR5_U_boost_stage_HP_1_2: R5_U_boost_stage_HP_1.2 U6_U_boost_stage_HP_1.9
NetR5_U_boost_stage_HP_2_1: R5_U_boost_stage_HP_2.1 U6_U_boost_stage_HP_2.8 U6_U_boost_stage_HP_2.10 U7_U_boost_stage_HP_2.7
NetR5_U_boost_stage_HP_2_2: R5_U_boost_stage_HP_2.2 U6_U_boost_stage_HP_2.9
NetR5_U_boost_stage_HP_3_1: R5_U_boost_stage_HP_3.1 U6_U_boost_stage_HP_3.8 U6_U_boost_stage_HP_3.10 U7_U_boost_stage_HP_3.7
NetR5_U_boost_stage_HP_3_2: R5_U_boost_stage_HP_3.2 U6_U_boost_stage_HP_3.9
NetR5_U_boost_stage_HP_4_1: R5_U_boost_stage_HP_4.1 U6_U_boost_stage_HP_4.8 U6_U_boost_stage_HP_4.10 U7_U_boost_stage_HP_4.7
NetR5_U_boost_stage_HP_4_2: R5_U_boost_stage_HP_4.2 U6_U_boost_stage_HP_4.9
NetR5_U_boost_stage_HP_6_1: R5_U_boost_stage_HP_6.1 U6_U_boost_stage_HP_6.8 U6_U_boost_stage_HP_6.10 U7_U_boost_stage_HP_6.7
NetR5_U_boost_stage_HP_6_2: R5_U_boost_stage_HP_6.2 U6_U_boost_stage_HP_6.9
PGND: U7_U_boost_stage_HP-5.6 U7_U_boost_stage_HP-5.17 U7_U_boost_stage_HP-5.18 U7_U_boost_stage_HP_1.6 U7_U_boost_stage_HP_1.17 U7_U_boost_stage_HP_1.18 U7_U_boost_stage_HP_2.6 U7_U_boost_stage_HP_2.17 U7_U_boost_stage_HP_2.18 U7_U_boost_stage_HP_3.6 U7_U_boost_stage_HP_3.17 U7_U_boost_stage_HP_3.18 U7_U_boost_stage_HP_4.6 U7_U_boost_stage_HP_4.17 U7_U_boost_stage_HP_4.18 U7_U_boost_stage_HP_6.6 U7_U_boost_stage_HP_6.17 U7_U_boost_stage_HP_6.18
SCL_U_boost_stage_HP-5: U5_U_boost_stage_HP-5.5 U6_U_boost_stage_HP-5.5
SCL_U_boost_stage_HP_1: U5_U_boost_stage_HP_1.5 U6_U_boost_stage_HP_1.5
SCL_U_boost_stage_HP_2: U5_U_boost_stage_HP_2.5 U6_U_boost_stage_HP_2.5
SCL_U_boost_stage_HP_3: U5_U_boost_stage_HP_3.5 U6_U_boost_stage_HP_3.5
SCL_U_boost_stage_HP_4: U5_U_boost_stage_HP_4.5 U6_U_boost_stage_HP_4.5
SCL_U_boost_stage_HP_6: U5_U_boost_stage_HP_6.5 U6_U_boost_stage_HP_6.5
SDA_U_boost_stage_HP-5: U5_U_boost_stage_HP-5.4 U6_U_boost_stage_HP-5.4
SDA_U_boost_stage_HP_1: U5_U_boost_stage_HP_1.4 U6_U_boost_stage_HP_1.4
SDA_U_boost_stage_HP_2: U5_U_boost_stage_HP_2.4 U6_U_boost_stage_HP_2.4
SDA_U_boost_stage_HP_3: U5_U_boost_stage_HP_3.4 U6_U_boost_stage_HP_3.4
SDA_U_boost_stage_HP_4: U5_U_boost_stage_HP_4.4 U6_U_boost_stage_HP_4.4
SDA_U_boost_stage_HP_6: U5_U_boost_stage_HP_6.4 U6_U_boost_stage_HP_6.4
VREF_P: C17.2 C18.2 R1.2 U1.32
pads on no net: J1.5 J1.6 U1.1 U1.2 U1.3 U1.4 U1.5 U1.7 U1.8 U1.9 U1.10 U1.11 U1.12 U1.13 U1.14 U1.15 U1.18 U1.19 U1.20 U1.21 U1.22 U1.23 U1.24 U1.25 U1.26 U1.27 U1.28 U1.29 U1.34 U1.35 U1.36 U1.37 U1.40 U1.41 U1.42 U1.43 U1.44 U1.45 U1.46 U1.47 U1.48 U1.49 U1.50 U1.53 U1.54 U1.55 U1.56 U1.57 U1.58 U1.59 U1.60 U1.63 U1.64 U1.65 U1.66 U1.67 U1.68 U1.69 U1.70 U1.73 U1.74 U1.75 U1.76 U1.77 U1.78 U1.79 U1.80 U1.81 U1.82 U1.85 U1.86 U1.87 U1.88 U1.89 U1.90 U1.91 U1.92 U1.93 U1.96 U1.97 U1.98 U1.99 U1.100 U1.101 U1.102 U1.105 U1.109 U1.110 U1.111 U1.112 U1.113 U1.114 U1.115 U1.116 U1.117 U1.118 U1.119 U1.122 U1.123 U1.124 U1.125 U1.126 U1.127 U1.128 U1.129 U1.132 U1.133 U1.134 U1.135 U1.136 U1.137 U1.138 U1.139 U1.140 U1.141 U1.142 U1.143 U7_U_boost_stage_HP-5.1 U7_U_boost_stage_HP-5.2 U7_U_boost_stage_HP-5.3 U7_U_boost_stage_HP-5.4 U7_U_boost_stage_HP-5.8 U7_U_boost_stage_HP-5.9 U7_U_boost_stage_HP-5.10 U7_U_boost_stage_HP-5.11 U7_U_boost_stage_HP-5.12 U7_U_boost_stage_HP-5.13 U7_U_boost_stage_HP-5.14 U7_U_boost_stage_HP-5.16 U7_U_boost_stage_HP_1.1 U7_U_boost_stage_HP_1.2 U7_U_boost_stage_HP_1.3 U7_U_boost_stage_HP_1.4 U7_U_boost_stage_HP_1.8 U7_U_boost_stage_HP_1.9 U7_U_boost_stage_HP_1.10 U7_U_boost_stage_HP_1.11 U7_U_boost_stage_HP_1.12 U7_U_boost_stage_HP_1.13 U7_U_boost_stage_HP_1.14 U7_U_boost_stage_HP_1.16 U7_U_boost_stage_HP_2.1 U7_U_boost_stage_HP_2.2 U7_U_boost_stage_HP_2.3 U7_U_boost_stage_HP_2.4 U7_U_boost_stage_HP_2.8 U7_U_boost_stage_HP_2.9 U7_U_boost_stage_HP_2.10 U7_U_boost_stage_HP_2.11 U7_U_boost_stage_HP_2.12 U7_U_boost_stage_HP_2.13 U7_U_boost_stage_HP_2.14 U7_U_boost_stage_HP_2.16 U7_U_boost_stage_HP_3.1 U7_U_boost_stage_HP_3.2 U7_U_boost_stage_HP_3.3 U7_U_boost_stage_HP_3.4 U7_U_boost_stage_HP_3.8 U7_U_boost_stage_HP_3.9 U7_U_boost_stage_HP_3.10 U7_U_boost_stage_HP_3.11 U7_U_boost_stage_HP_3.12 U7_U_boost_stage_HP_3.13 U7_U_boost_stage_HP_3.14 U7_U_boost_stage_HP_3.16 U7_U_boost_stage_HP_4.1 U7_U_boost_stage_HP_4.2 U7_U_boost_stage_HP_4.3 U7_U_boost_stage_HP_4.4 U7_U_boost_stage_HP_4.8 U7_U_boost_stage_HP_4.9 U7_U_boost_stage_HP_4.10 U7_U_boost_stage_HP_4.11 U7_U_boost_stage_HP_4.12 U7_U_boost_stage_HP_4.13 U7_U_boost_stage_HP_4.14 U7_U_boost_stage_HP_4.16 U7_U_boost_stage_HP_6.1 U7_U_boost_stage_HP_6.2 U7_U_boost_stage_HP_6.3 U7_U_boost_stage_HP_6.4 U7_U_boost_stage_HP_6.8 U7_U_boost_stage_HP_6.9 U7_U_boost_stage_HP_6.10 U7_U_boost_stage_HP_6.11 U7_U_boost_stage_HP_6.12 U7_U_boost_stage_HP_6.13 U7_U_boost_stage_HP_6.14 U7_U_boost_stage_HP_6.16

## Text inside footprints (layer, text, board x,y; h text height)
U1: Top Overlay "REFDES" at 4212.5,4025 h50; Top Overlay "RefDes" at 4225,4025 h50; Mechanical 13 "RefDes2" at 4212.5,4025 h50
U3: Top Overlay "*" at 5970.36,4741.97 h50; Mechanical 13 "*" at 6024,4696 h50
U4: Top Overlay "RefDes" at 10205,1680 h50 r90; Top Overlay "REFDES" at 10205,1667.5 h50 r90; Mechanical 13 "RefDes2" at 10205,1667.5 h50 r90
U5_U_boost_stage_HP-5: Top Overlay "*" at 1904.62,1540.36 h50 r90; Mechanical 13 "*" at 1942,1591.5 h50 r90
U5_U_boost_stage_HP_1: Top Overlay "*" at 3104.62,1540.36 h50 r90; Mechanical 13 "*" at 3142,1591.5 h50 r90
U5_U_boost_stage_HP_2: Top Overlay "*" at 4154.62,1590.36 h50 r90; Mechanical 13 "*" at 4192,1641.5 h50 r90
U5_U_boost_stage_HP_3: Top Overlay "*" at 5184.93,1503.22 h50 r90; Mechanical 13 "*" at 5222.31,1554.36 h50 r90
U5_U_boost_stage_HP_4: Top Overlay "*" at 6104.62,1540.36 h50 r90; Mechanical 13 "*" at 6142,1591.5 h50 r90
U5_U_boost_stage_HP_6: Top Overlay "*" at 7104.62,1590.36 h50 r90; Mechanical 13 "*" at 7142,1641.5 h50 r90
U6_U_boost_stage_HP-5: Top Overlay "*" at 1904.62,2040.36 h50 r90; Mechanical 13 "*" at 1942,2091.5 h50 r90
U6_U_boost_stage_HP_1: Top Overlay "*" at 3044,2103.22 h50 r90; Mechanical 13 "*" at 3081.38,2154.36 h50 r90
U6_U_boost_stage_HP_2: Top Overlay "*" at 4154.62,2140.36 h50 r90; Mechanical 13 "*" at 4192,2191.5 h50 r90
U6_U_boost_stage_HP_3: Top Overlay "*" at 5174.31,2153.22 h50 r90; Mechanical 13 "*" at 5211.69,2204.36 h50 r90
U6_U_boost_stage_HP_4: Top Overlay "*" at 6104.62,1990.36 h50 r90; Mechanical 13 "*" at 6142,2041.5 h50 r90
U6_U_boost_stage_HP_6: Top Overlay "*" at 7094,2177.5 h50 r90; Mechanical 13 "*" at 7131.38,2228.64 h50 r90
U7_U_boost_stage_HP-5: Top Overlay "RefDes" at 6875,2474.29 h50 r180; Top Overlay "Designator232" at 6918,2268.29 h50 r180
U7_U_boost_stage_HP_1: Top Overlay "RefDes" at 5824.59,2429.12 h50 r180; Top Overlay "Designator232" at 5867.59,2223.12 h50 r180
U7_U_boost_stage_HP_2: Top Overlay "RefDes" at 4875,2425 h50 r180; Top Overlay "Designator232" at 4918,2219 h50 r180
U7_U_boost_stage_HP_3: Top Overlay "RefDes" at 3866.14,2453.15 h50 r180; Top Overlay "Designator232" at 3909.14,2247.15 h50 r180
U7_U_boost_stage_HP_4: Top Overlay "RefDes" at 2774.59,2379.12 h50 r180; Top Overlay "Designator232" at 2817.59,2173.12 h50 r180
U7_U_boost_stage_HP_6: Top Overlay "RefDes" at 1552.51,2503.4 h50 r180; Top Overlay "Designator232" at 1595.51,2297.4 h50 r180